# Altium PCB OIS_Patch.PcbDoc
Units mm, origin at the board's own origin, x right, y up, seen from the top; angles counter-clockwise.
Board outline 22.61 x 43.95 mm, 2 copper layers (Top Layer, Bottom Layer); 5 components, 9 nets, 31 pads, 3 vias.
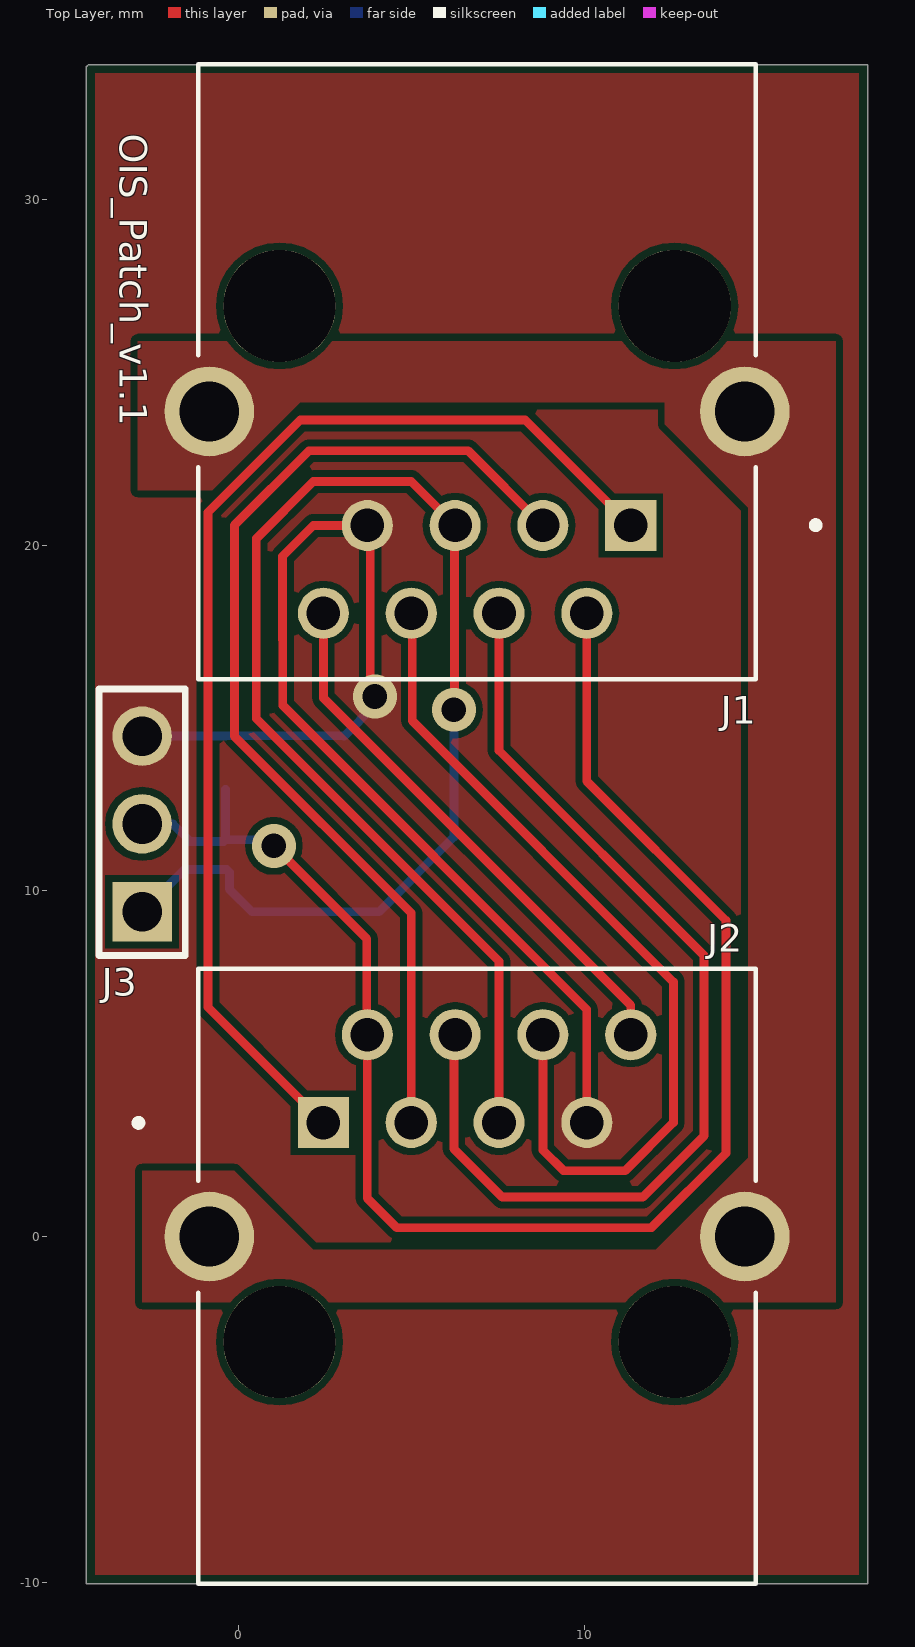
[diagram p0: Top Layer view]
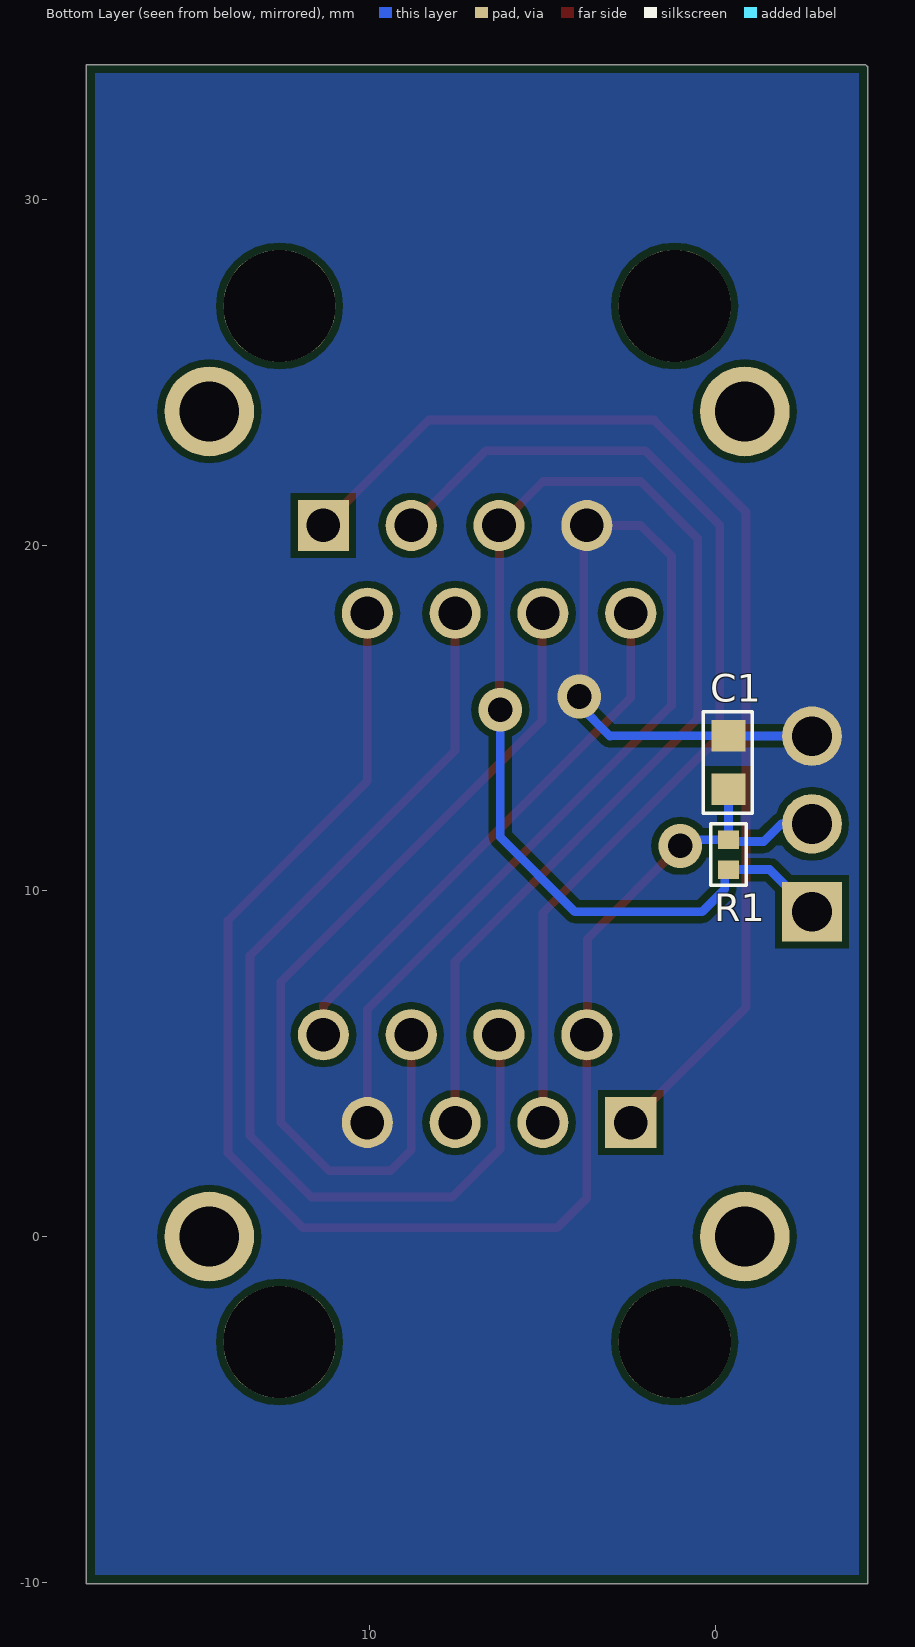
[diagram p1: Bottom Layer view, seen from below]

## Layer stack, top to bottom
Top Solder: solder mask 0.0102, Solder Resist, Dk 3.5
Top Layer: signal copper 0.0356
Dielectric 1: dielectric 0.32, FR-4, Dk 4.8
Bottom Layer: signal copper 0.0356
Bottom Solder: solder mask 0.0102, Solder Resist, Dk 3.5

## Board outline
-4.409,9.65 -4.409,33.844 -4.346,33.907 18.197,33.907 18.197,-10.04 -4.409,-10.04

## Design rules (kind name [scope] priority, off if disabled: settings)
BoardOutlineClearance [All] p1: gap=0.254 ignorepadtopadclearanceinfootprint=FALSE except(0: Arc-SplitContinuation Track-SplitContinuation SMDPad-SplitContinuation THPad-SplitContinuation Via-SplitContinuation Fill-SplitContinuation Poly-SplitContinuation Region-SplitContinuation Text-SplitContinuation)
Clearance Clearance_poly [InPolygon] p1: gap=0.2 ignorepadtopadclearanceinfootprint=FALSE
Clearance "Poly to Poly" [IsRegion AND (OnLayer('L1') OR OnLayer('L2') OR OnLayer('L3') OR OnLayer('L4')) vs IsRegion OR IsTrack] p2: gap=0.2 ignorepadtopadclearanceinfootprint=FALSE
Clearance Clearance_NPTH [(PadIsPlated = 'False')] p3: gap=0.2 ignorepadtopadclearanceinfootprint=FALSE
Clearance [All] p4: gap=0.152 ignorepadtopadclearanceinfootprint=FALSE except(0.13: Track-SMDPad Track-THPad SMDPad-SMDPad SMDPad-THPad)
DiffPairsRouting [All] p1: maxlimit=0.254 minlimit=0.254 mostfreqgap=0.254 toplayer_minwidth=0.381 toplayer_maxwidth=0.381 toplayer_prefwidth=0.381 bottomlayer_minwidth=0.381 bottomlayer_maxwidth=0.381 bottomlayer_prefwidth=0.381 maxuncoupledlength=12.7
Height [All] p1: minheight=0 maxheight=150 prefheight=12.7
HoleSize [All] p1: absolutevalues=TRUE maxlimit=12 minlimit=0.025 maxpercent=80.000 minpercent=20.000
MinimumSolderMaskSliver [All] p1: minsoldermaskwidth=0
PolygonConnect [All] p1: connectstyle=Direct reliefconductorwidth=0.254 reliefentries=4 polygonreliefangle="90 Angle" airgapwidth=0.254
RoutingVias [All] p1: holewidth=0.3 width=0.6 viastyle="Through Hole" minholewidth=0.3 minwidth=0.6 maxholewidth=1 maxwidth=0.6
SilkToSilkClearance [All] p1: silktosilkclearance=0
SilkToSolderMaskClearance [IsPad] p1: minsilkscreentomaskgap=0 clearancetoexposedcopper=TRUE
SolderMaskExpansion [All] p1: expansion=0.102 istentingtop=FALSE
Width [All] p1: maxlimit=1 minlimit=0.152 preferedwidth=0.152 minimp=50.000000 maximp=50.000000 favimp=50.000000
24 further rules are at their usual default settings.

## Classes and differential pairs
differential pair DD: +DD_P -DD_N
differential pair DC: +DC_P -DA_N
differential pair DB: +DB_P -DB_N
differential pair DA: +DA_P -DC_N

## Components (designator, comment, footprint, x,y, rotation, side; value= is the part's Value field where it differs from the comment)
C1 "1uF" C0603 -0.381,13.716 r90 bottom
J1 "SS-6488S-A-PG4-BA" SS-6488S-A-PG4-BA 6.894,26.922 r180 top locked
J2 "SS-6488S-A-PG4-BA" SS-6488S-A-PG4-BA 6.894,-3.05 r0 top locked
J3 "Comment" 2.54_3P -2.794,9.398 r90 top
R1 "1K" R0402 -0.381,11.049 r270 bottom

## Footprints (in the part's own frame and the unit in brackets; to place one, negate y for a bottom-side part, rotate by r counter-clockwise, add the part's x,y. Pads: shape width x height; smd on the part's side, far side on the other; paste and mask are expansions set on the pad)
2.54_3P [mm]
  rect 1.725x1.725 hole 1.15: 1(0,0)
  round 1.725 hole 1.15: 2(2.54,0) 3(5.08,0)
  silkscreen extent -1.27,-1.24 6.44,1.24
C0603 [mm]
  rect 0.92x0.98 smd: 1(-0.775,0) 2(0.775,0)
  silkscreen extent -1.47,-0.69 1.47,0.74, body extent -0.77,-0.46 0.83,0.44, height 0.79
R0402 [mm]
  rect 0.54x0.6 smd: 1(-0.432,0) 2(0.432,0)
  silkscreen extent -0.89,-0.51 0.89,0.51, body extent -0.5,-0.25 0.5,0.25, height 0.4
SS-6488S-A-PG4-BA [mm]
  rect 1.478x1.478 hole 0.97: 1(-4.445,6.35)
  round 1.478 hole 0.97: 2(-3.175,8.89) 3(-1.905,6.35) 4(-0.635,8.89) 5(0.635,6.35) 6(1.905,8.89) 7(3.175,6.35) 8(4.445,8.89)
  round 2.595 hole 1.73: S1(-7.745,3.05) S2(7.745,3.05)
  round 3.25 hole 3.25 unplated: ""(-5.715,0) ""(5.715,0)
  silkscreen extent -9.9,-6.99 8.07,10.8, body extent -9.04,-10.76 8.94,10.28, height 14.81

## Part data
C1: library part CGA3E1X7R1E105M080AC, "CAP CER 1UF 25V X7R 0603", Manufacturer="TDK Corporation", Package="0603(1608 Metric)", Temperature Coefficient=X7R, Tolerance=±20%, Voltage=25V, Datasheet=https://product.tdk.com/en/system/files?file=dam/doc/product/capacitor/ceramic/mlcc/catalog/mlcc_automotive_general_en.pdf, Manufacturer Part Number=CGA3E1X7R1E105M080AC, Name="Recep Aydin", Part Number=CGA3E1X7R1E105M080AC, Que=017, Type=Ceramic
J1 J2: "Jack Modular Connector 8p8c (RJ45, Ethernet) 90Â° Angle (Right) Shielded, EMI Finger", Package=None, Arrow_Europe-Purchase-URL=https://snapeda.com/shop?store=Arrow+Europe&id=700071, Availability=Good, Check_prices=https://www.snapeda.com/parts/SS-6488S-A-PG4-BA/Stewart%20Connector/view-part/700071/?ref=eda, DigiKey-Purchase-URL=https://snapeda.com/shop?store=DigiKey&id=700071, MF="Bel Fuse", Mouser-Purchase-URL=https://snapeda.com/shop?store=Mouser&id=700071, MP=SS-6488S-A-PG4-BA, Price=None, SnapEDA_Link=https://www.snapeda.com/parts/SS-6488S-A-PG4-BA/Stewart%20Connector/view-part/700071/?ref=snap
J3: library part CONN_3X2.54, "CONN_3X2.54", Part Number=CONN_3X2.54, Que=101
R1: library part RT0402BRE071KL, "RES SMD 1K OHM 0.1% 1/16W 0402", Manufacturer=Yageo, Package=0402, Resistor Type="Thick Film", Tolerance=0.1%, Datasheet=https://www.yageo.com/upload/media/product/productsearch/datasheet/rchip/PYu-RT_1-to-0.01_RoHS_L_12.pdf, Manufacturer Part Number=RT0402BRE071KL, Name="Recep Aydin", Part Number=RT0402BRE071KL, Que=015

## Via types
v1: diameter 1.27, hole 0.711, Top Layer to Bottom Layer, tented both sides, 3 vias

## Nets (pads, with @x,y where several pads share a name; then routed paths per layer and width w, separated by ;. In a path a pad name is that pad's centre, name@x,y a point inside that pad or via, vN(x,y) a via of type N, cw(c..) or ccw(c..) an arc to the next point about the centre after c; other vN are vias at no path point)
DA_N: C1.1 J1.2 J2.2 J3.2 R1.1 | length 45.8
  Top Layer w0.254: v1(1.016,11.303) 3.701,8.618 3.701,5.858 J2.2 3.719,1.107 4.572,0.254 11.938,0.254 14.097,2.413 14.097,9.144 10.069,13.172 J1.2
  Bottom Layer w0.254: J3.2 -1.905,11.938 -1.397,11.43 -0.432,11.43 -0.406,11.456 R1.1 ; C1.1 R1.1 ; v1(1.016,11.303) 0.775,11.303 0.597,11.481 R1.1
DA_P: J1.1 J2.1 | length 33.6
  Top Layer w0.254: J2.1 -0.889,6.638 -0.889,20.955 1.778,23.622 8.289,23.622 J1.1
DB_N: J1.6 J2.6 | length 25.8
  Top Layer w0.254: J1.6 5.016,18.004 5.016,14.922 12.573,7.366 12.573,3.302 11.176,1.905 9.398,1.905 8.799,2.504 J2.6
DB_P: J1.3 J2.3 | length 30.1
  Top Layer w0.254: J2.3 4.989,9.362 -0.127,14.478 -0.127,20.574 2.032,22.733 6.638,22.733 J1.3
DC_N: J1.5 J2.5 J3.1 R1.2 | length 47
  Top Layer w0.254: v1(6.224,15.241) 6.242,15.259 6.242,20.555 J1.5 4.987,21.844 2.159,21.844 0.508,20.193 0.508,14.986 7.529,7.965 J2.5
  Bottom Layer w0.254: J3.1 -1.575,10.617 -0.351,10.617 -0.272,10.537 -0.272,10.051 0.381,9.398 4.064,9.398 6.224,11.558 v1(6.224,15.241)
DC_P: J1.4 J2.4 | length 29.4
  Top Layer w0.254: J2.4 6.223,5.804 6.223,2.54 7.62,1.143 11.684,1.143 13.462,2.921 13.462,8.128 7.529,14.061 J1.4
DD_N: J1.8 J2.8 | length 15.9
  Top Layer w0.254: J1.8 2.449,15.585 11.339,6.695 J2.8
DD_P: C1.2 J1.7 J2.7 J3.3 | length 35.3
  Top Layer w0.254: v1(3.937,15.624) 3.805,15.755 3.805,20.486 J1.7 2.157,20.572 1.265,19.68 1.265,17.277 1.27,17.272 1.27,15.367 10.069,6.568 J2.7
  Bottom Layer w0.254: J3.3 -2.788,14.484 -0.387,14.484 C1.2 3.035,14.491 3.048,14.478 3.937,15.367 v1(3.937,15.624)
FGND: J1.S1 J1.S2 J2.S1 J2.S2
pads on no net: J1. J2.

## Polygon pours and split planes (outlines as drawn)
DD_P on Top Layer "DD_P_L01_P004" (solid, pour order 4): -4.346,33.907 18.197,33.907 18.197,-10.04 -4.409,-10.04 -4.346,-9.977
FGND on Top Layer "FGND_L01_P003" (solid, pour order 3): -2.921,21.59 -0.762,21.59 1.778,24.13 12.319,24.13 12.319,23.495 14.732,21.082 14.732,2.286 12.065,-0.381 2.159,-0.381 -0.127,1.905 -2.794,1.905 -2.794,-1.905 17.272,-1.905 17.272,25.908 -2.921,25.908
DD_P on Bottom Layer "DD_P_L02_P001" (solid, pour order 1): -4.346,33.907 18.197,33.907 18.197,-10.04 -4.409,-10.04 -4.409,33.844

## Silkscreen, mask and mechanical layers (free items; w line width, h text height)
Top Overlay:
  text "OIS_Patch_v1.1" at -3.45,31.904 h0.8 r270
Mechanical 13:
  lines w0.254: -4.409,33.844 -4.346,33.907
BoardOutline:
  lines w0.2: -4.409,33.844 -4.409,26.668 -4.409,16.127 -4.409,9.65 -4.409,2.665 -4.409,-10.04 18.197,-10.04 18.197,33.907 -4.346,33.907

## Text inside footprints (layer, text, board x,y; h text height)
J1: Mechanical 13 "PCB Edge" at -3.271,33.412 h0.81 r180
J2: Mechanical 13 "PCB Edge" at 17.059,-9.54 h0.81